# Altium PCB PCB.PcbDoc
Units mm, origin at the board's own origin, x right, y up, seen from the top; angles counter-clockwise.
Board outline 131.83 x 91.69 mm, 2 copper layers (Top Layer, Bottom Layer); 45 components, 60 nets, 198 pads, 15 vias.
Unrouted connection lines stored in the file: 1.
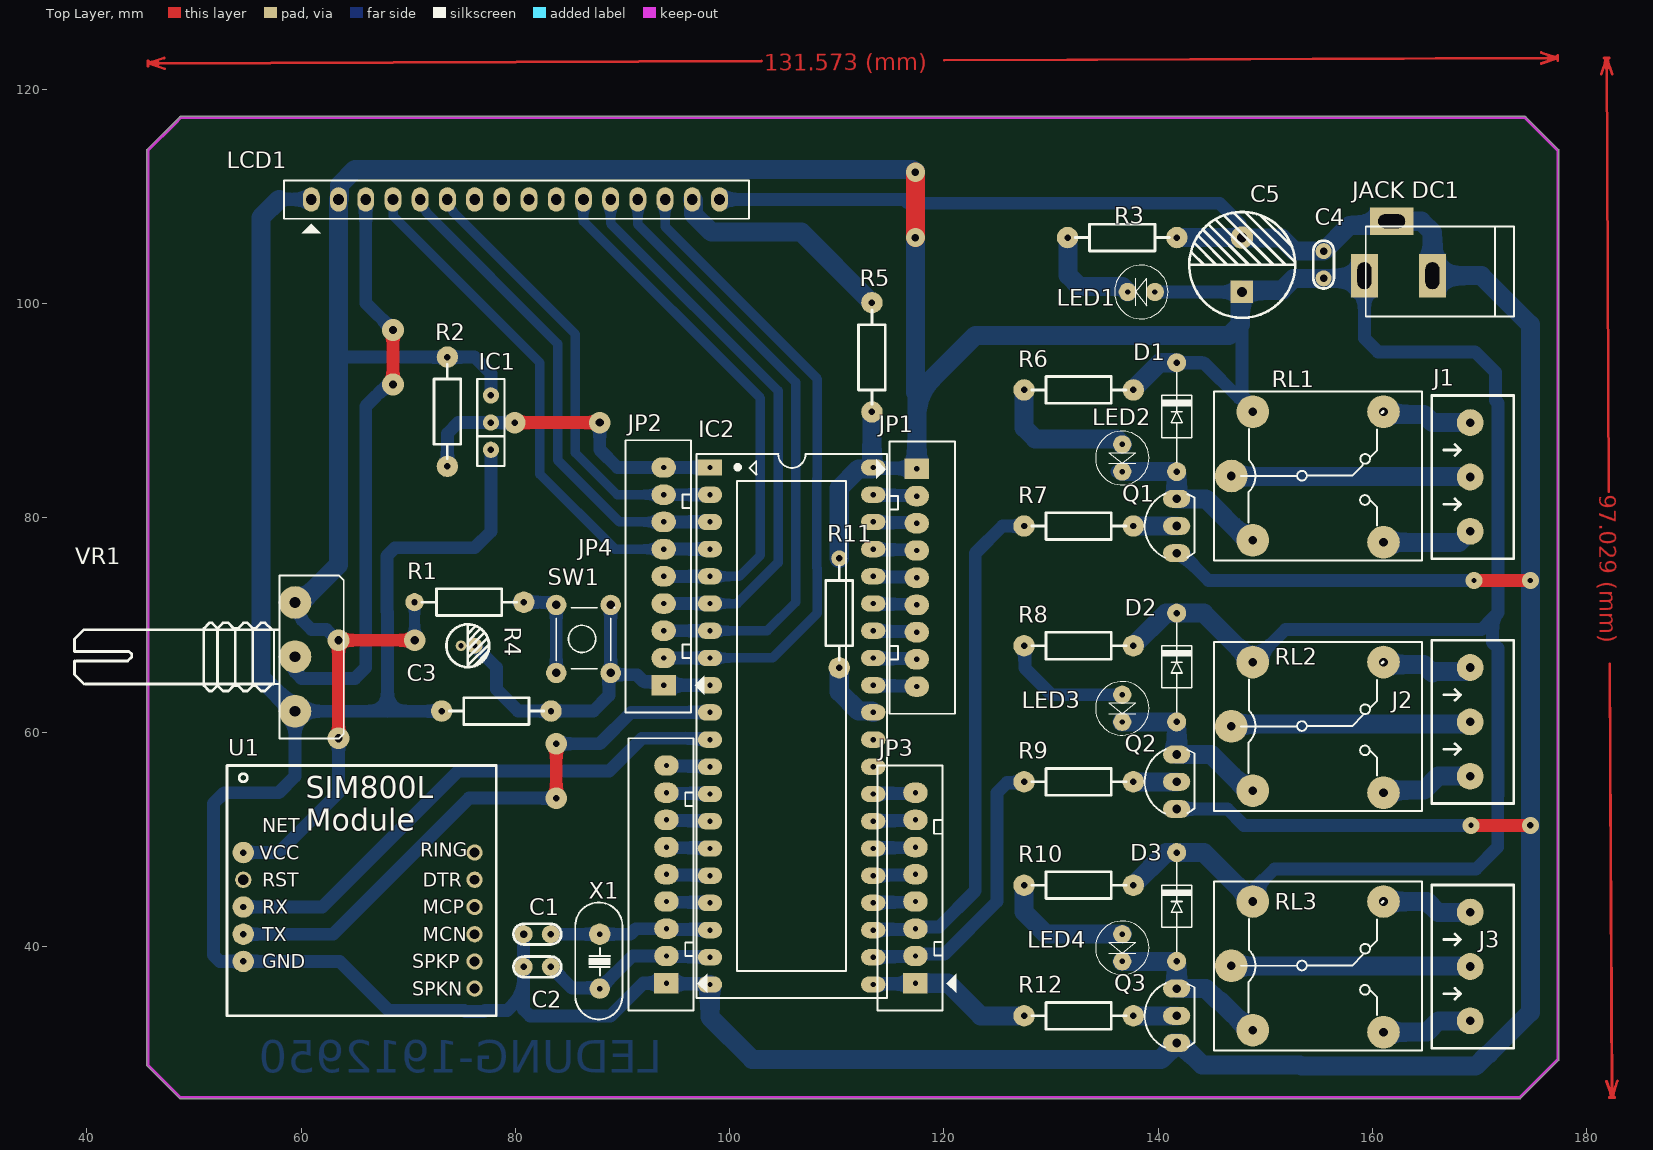
[diagram p0: Top Layer view]
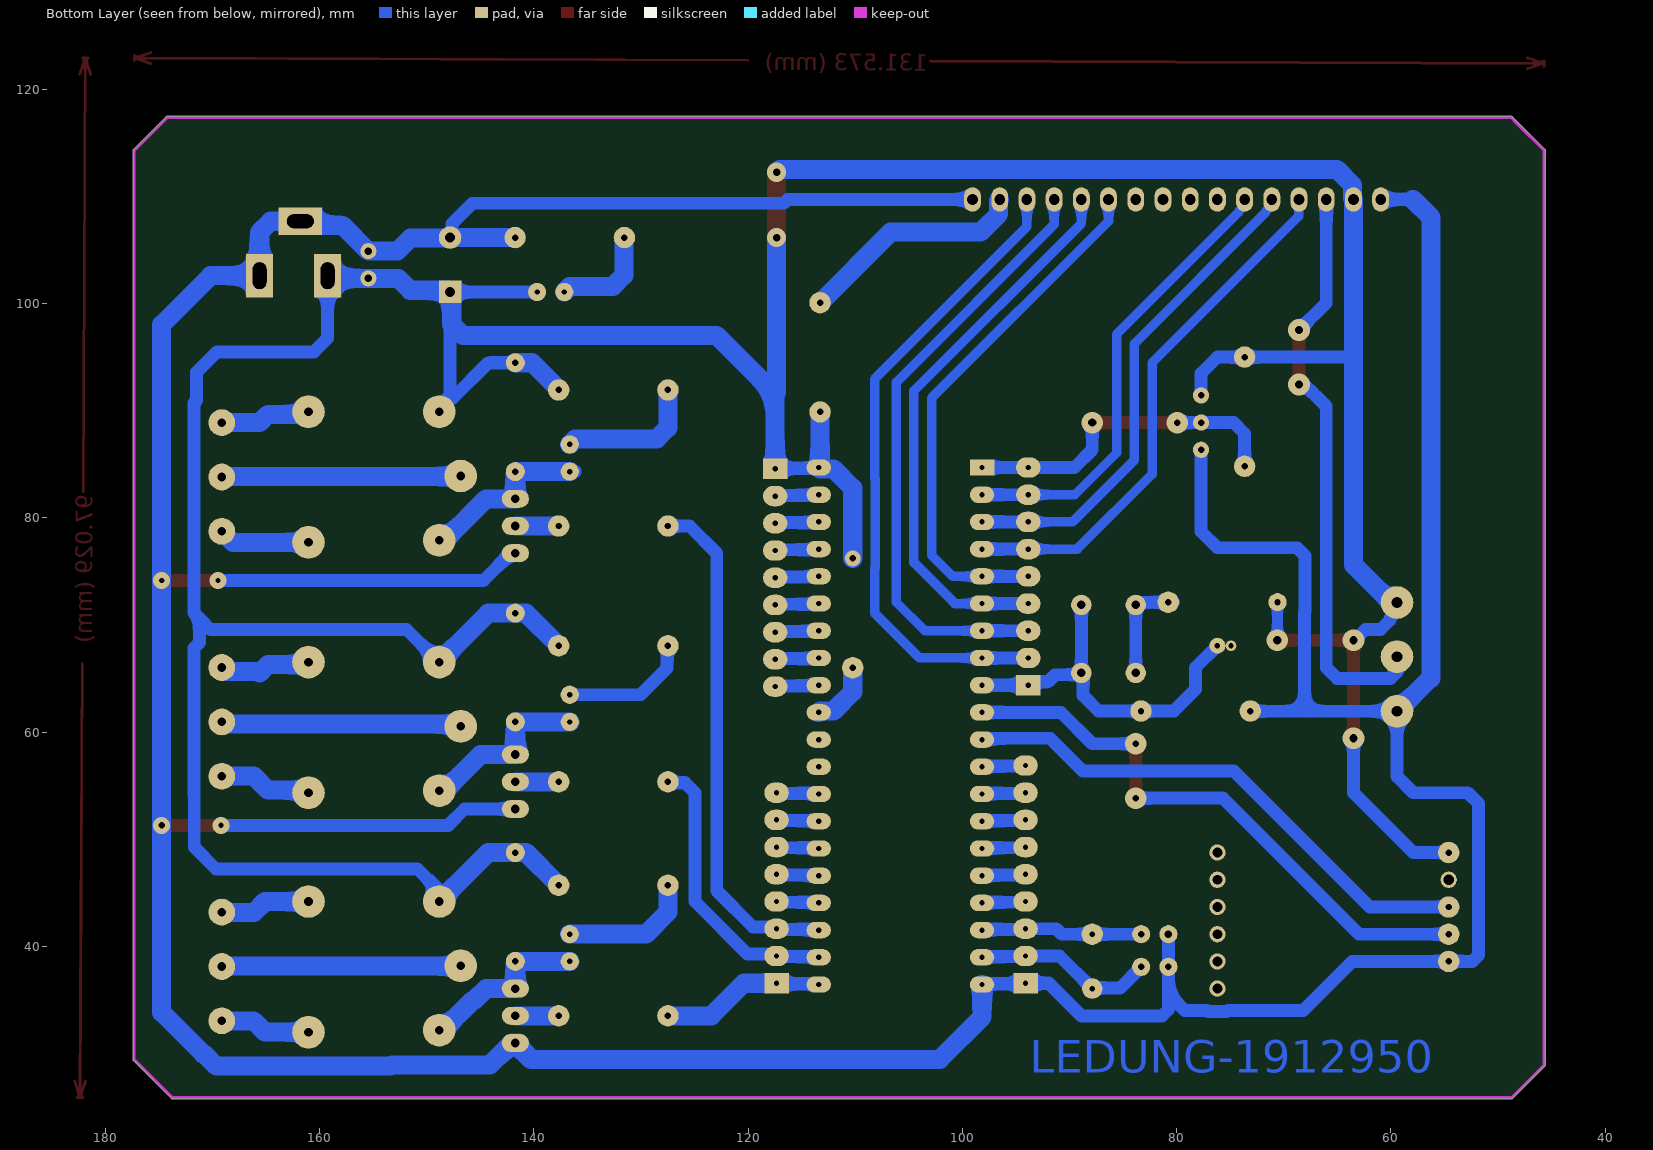
[diagram p1: Bottom Layer view, seen from below]
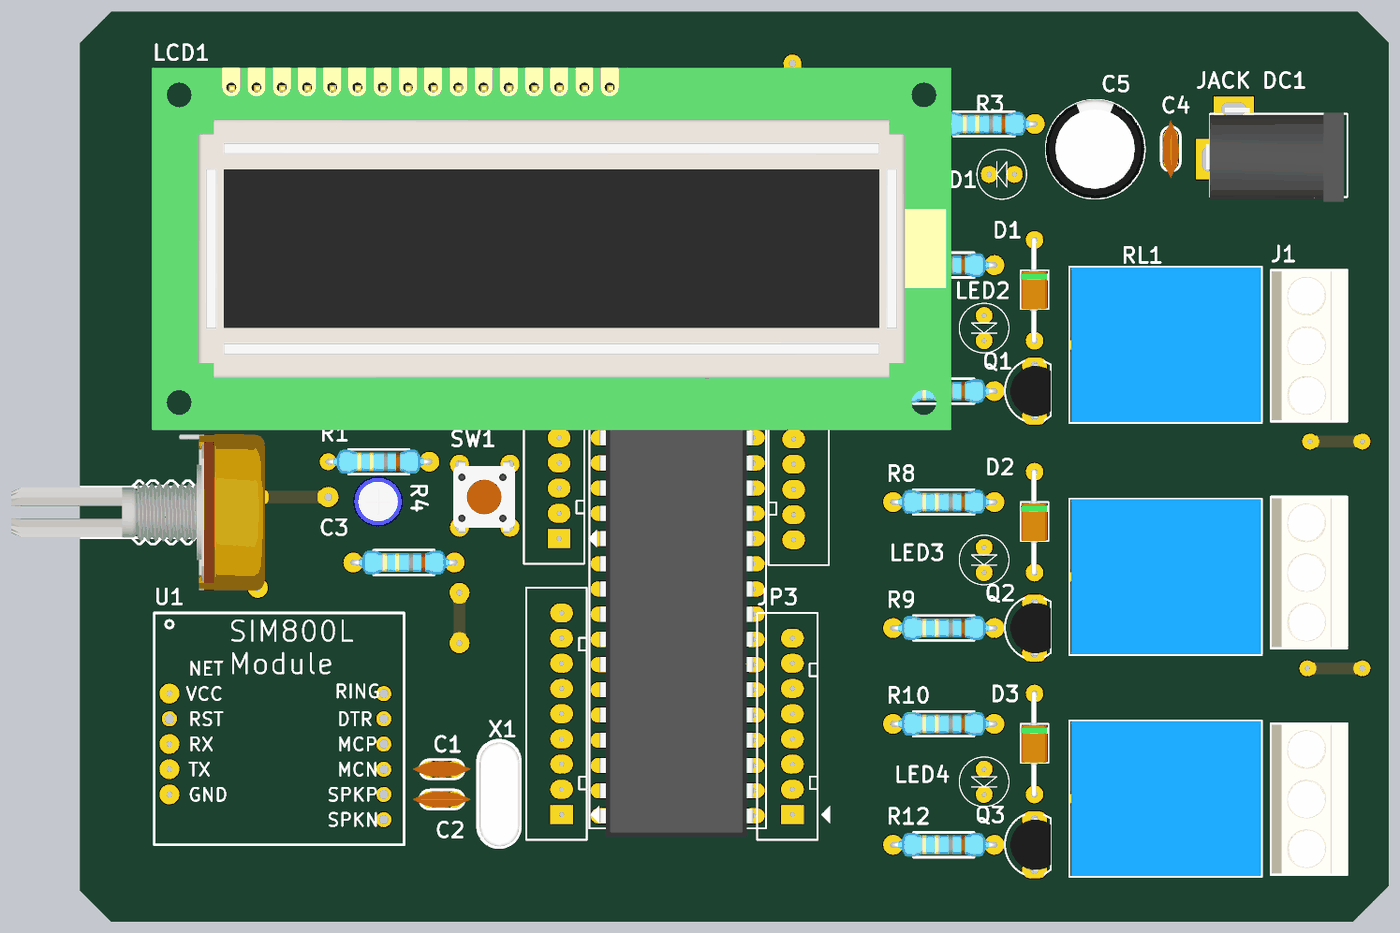
[diagram p2: 3D render of the assembled board from above, using the file's embedded part models]

## Layer stack, top to bottom
Top Solder: solder mask 0.0102, Solder Resist, Dk 3.5
Top Layer: signal copper 0.0356
Dielectric 1: dielectric 0.32, FR-4, Dk 4.8
Bottom Layer: signal copper 0.0356
Bottom Solder: solder mask 0.0102, Solder Resist, Dk 3.5

## Board outline
45.593,28.956 45.593,45.72 45.593,89.408 45.593,114.3 cw(c45.72,114.3) 45.63,114.39 48.678,117.438 cw(c48.768,117.349) 48.768,117.475 174.244,117.475 cw(c174.244,117.348) 174.335,117.438 177.382,114.39 cw(c177.293,114.3) 177.419,114.3 177.419,29.464 cw(c177.292,29.464) 177.382,29.373 173.826,25.818 cw(c173.736,25.907) 173.736,25.781 48.768,25.781 cw(c48.768,25.908) 48.677,25.818 45.63,28.866 cw(c45.719,28.956)

## Design rules (kind name [scope] priority, off if disabled: settings)
Clearance [All] p1: gap=0.762 ignorepadtopadclearanceinfootprint=FALSE
PolygonConnect [All] p1: connectstyle=Relief reliefconductorwidth=0.254 reliefentries=4 polygonreliefangle="90 Angle" airgapwidth=0.254
RoutingVias [All] p1: holewidth=0.762 width=2.032 viastyle="Through Hole" minholewidth=0.762 minwidth=2.032 maxholewidth=0.762 maxwidth=2.032
SolderMaskExpansion [All] p1: expansion=0.102 istentingtop=FALSE
Width [All] p1: maxlimit=1.778 minlimit=0.508 preferedwidth=1.016
30 further rules are at their usual default settings.

## Components (designator, comment, footprint, x,y, rotation, side; value= is the part's Value field where it differs from the comment)
C1 "30pF" "tu gom"#1 82.042,41.148 r180 top
C2 "33pF" "tu gom"#2 82.042,38.1 r180 top
C3 "10uF" "tu hoa 4mm" 75.565,68.072 r0 top
C4 "104" "tu gom"#3 155.448,103.632 r270 top
C5 "1000uF" "tu hoa 10mm" 147.828,103.632 r90 top
D1 "Diode" DIO-1A 141.732,84.328 r90 top value=1N5007
D2 "Diode" DIO-1A 141.732,60.96 r90 top value=1N5007
D3 "Diode" DIO-1A 141.732,38.608 r90 top value=1N5007
IC1 "DS18S20" JP3-C1T 77.724,86.36 r90 top
IC2 "AT89C52" DIP40/W0.6 98.171,84.709 r270 top
J1 "KF3" KF3-5.08 169.126,88.9 r270 top
J2 "KF3" KF3-5.08 169.126,66.04 r270 top
J3 "KF3" KF3-5.08 169.126,43.21 r270 top
"JACK DC1" "JACK DC 5.5" "JACK DC 5.5" 162.433,105.156 r180 top value="Jac DC"
JP1 "JP9" Header9 117.475,84.582 r270 top value="Connector 9"
JP2 "JP9" Header9 93.853,64.389 r90 top value="Connector 9"
JP3 "JP8" Header8 117.348,36.576 r90 top value="Connector 8"
JP4 "JP9" Header9 94.107,36.576 r90 top value="Connector 9"
LCD1 "LCD1602 XL" "LCD1602 with Jump" 60.96,109.728 r0 top
LED1 "LED" LED-5MM-RED 139.7,101.092 r180 top value="LED 3 ly Single Colour"
LED2 "LED" LED-5MM-RED 136.652,86.868 r270 top value="LED 3 ly Single Colour"
LED3 "LED" LED-5MM-RED 136.652,63.5 r270 top value="LED 3 ly Single Colour"
LED4 "LED" LED-5MM-RED 136.652,41.148 r270 top value="LED 3 ly Single Colour"
Q1 "2N3904" TO92-123 141.732,79.248 r90 top value=C1815
Q2 "2N3904" TO92-123 141.732,55.372 r90 top value=C1815
Q3 "2N3904" TO92-123 141.732,33.528 r90 top value=C1815
R1 "1k" "tro vach 1/4w"#1 75.692,72.136 r0 top
R2 "4.7K" "tro vach 1/4w"#2 73.66,89.916 r90 top
R3 "330" "tro vach 1/4w"#2 136.652,106.172 r0 top
R4 "10k" "tro vach 1/4w"#2 78.232,61.976 r0 top
R5 "470R" "tro vach 1/4w"#2 113.284,94.996 r90 top
R6 "330" "tro vach 1/4w"#2 132.588,91.948 r0 top
R7 "4.7K" "tro vach 1/4w"#2 132.588,79.248 r0 top
R8 "330" "tro vach 1/4w"#2 132.588,68.072 r0 top
R9 "4.7K" "tro vach 1/4w"#2 132.588,55.372 r0 top
R10 "330" "tro vach 1/4w"#2 132.588,45.72 r0 top
R11 "10k" "tro vach 1/4w"#3 110.236,71.12 r90 top
R12 "4.7K" "tro vach 1/4w"#2 132.588,33.528 r0 top
RL1 "Relay" "Relay 5 Chan SRD" 146.836,83.916 r0 top
RL2 "Relay" "Relay 5 Chan SRD" 146.836,60.548 r0 top
RL3 "Relay" "Relay 5 Chan SRD" 146.836,38.196 r0 top
SW1 "SW" SW2-DIP 83.82,65.532 r90 top value="Button chip 4 pin"
U1 "SIM800L" "SIM800L MODULE" 54.61,38.608 r0 top
VR1 "10K" "Bien Tro Volume Don" 59.436,72.111 r270 top
X1 "11.0592Mhz" XT2 87.884,38.608 r90 top value=4Mhz

## Footprints (in the part's own frame and the unit in brackets; to place one, negate y for a bottom-side part, rotate by r counter-clockwise, add the part's x,y. Pads: shape width x height; smd on the part's side, far side on the other; paste and mask are expansions set on the pad)
"Bien Tro Volume Don" [mil] "Volume control single"
  round 120 hole 39.37: 1(0,0) 2(199,0) 3(400,0)
  silkscreen extent -99,-810 500,179, body extent -110,-818 510,188, height 839
DIO-1A [mil]
  round 70 hole 23.62: 1(0,0) 2(400,0)
  silkscreen extent 35,-55 365,55, body extent -11,-50 411,54, height 102
DIP40/W0.6 [mil] "40 PIN, W 600mil, Pin to pin 100mil"
  rect 60x90 hole 19.68: 1(0,0)
  oval 60x90 hole 19.68: 2(100,0) 3(200,0) 4(300,0) 5(400,0) 6(500,0) 7(600,0) 8(700,0) 9(800,0) 10(900,0) 11(1000,0) 12(1100,0) 13(1200,0) 14(1300,0) 15(1400,0) 16(1500,0) 17(1600,0) 18(1700,0) 19(1800,0) 20(1900,0) 21(1900,600) 22(1800,600) 23(1700,600) 24(1600,600) 25(1500,600) 26(1400,600) 27(1300,600) 28(1200,600) 29(1100,600) 30(1000,600) 31(900,600) 32(800,600) 33(700,600) 34(600,600) 35(500,600) 36(400,600) 37(300,600) 38(200,600) 39(100,600) 40(0,600)
  silkscreen extent -50,-50 1950,650, body extent -82,-10 1982,600, height 224
Header8 [mm] "CON8"
  rect 1.905x2.286 hole 0.5: 1(0,0)
  oval 1.905x2.286 hole 0.5: 2(2.54,0) 3(5.08,0) 4(7.62,0) 5(10.16,0) 6(12.7,0) 7(15.24,0) 8(17.78,0)
  silkscreen extent -2.54,-3.8 20.32,3.56
Header9 [mm] "CON9"
  rect 1.905x2.286 hole 0.5: 1(0,0)
  oval 1.905x2.286 hole 0.5: 2(2.54,0) 3(5.08,0) 4(7.62,0) 5(10.16,0) 6(12.7,0) 7(15.24,0) 8(17.78,0) 9(20.32,0)
  silkscreen extent -2.54,-3.8 22.86,3.56
"JACK DC 5.5" [mm] "Jac DC input"
  rect 2.54x4.064 hole 1.3 slot 2.5 at 90 deg: 1(3.175,2.54) 2(-3.175,2.54)
  rect 4.064x2.54 hole 1.3 slot 2.5 at 0 deg: 3(0.635,-2.54)
  silkscreen extent -10.8,-2.03 3.05,6.35, body extent -10.42,-2.67 3.4,6.84, height 11.02
JP3-C1T [mm] "3 row, straight, gold plating"
  round 1.52 hole 0.6: 1(0,0) 2(2.54,0) 3(5.08,0)
  silkscreen extent -1.52,-1.27 6.6,1.27, body extent -1.52,-1.25 6.6,1.25, height 8.51
KF3-5.08 [mm]
  round 2.5 hole 0.8: 1(0,0) 2(5.08,0) 3(10.147,0)
  silkscreen extent -2.54,-3.58 12.7,4.06, body extent -2.42,-3.51 12.58,3.99, height 10
"LCD1602 with Jump" [mil] "LCD dipslay 16x2, 16 pin"
  oval 62x90 hole 39: 1(0,0) 2(100,0) 3(200,0) 4(300,0) 5(400,0) 6(500,0) 7(600,0) 8(700,0) 9(800,0) 10(900,0) 11(1000,0) 12(1100,0) 13(1200,0) 14(1300,0) 15(1400,0) 16(1500,0)
  silkscreen extent -100,-125 1608,70, body extent -320,-1353 2850,84, height 764
LED-5MM-RED [mm]
  round 1.7 hole 0.5: 1(0,0) 2(2.54,0)
  silkscreen extent -1.23,-2.5 3.77,2.5, body extent -1.38,-2.67 3.94,2.66, height 9.4
"Relay 5 Chan SRD" [mm] "Relay SPDT, 5 pin, 10A,W 650mil, L 800mil, H 800mil"
  round 3.048 hole 0.8: 1(0,0) 2(14.2,6) 3(14.2,-6.192) 4(2,-6) 5(2,6)
  silkscreen extent -1.61,-7.89 17.78,7.87, body extent -1.4,-7.77 17.7,7.73, height 15.3
"SIM800L MODULE" [mm]
  round 2 hole 0.6: 1(0,10.16) 3(0,5.08) 4(0,2.54) 5(0,0)
  round 1.52 hole 1: 2(0,7.62)
  round 1.52 hole 0.91: 6(21.59,10.16) 7(21.59,7.62) 8(21.59,5.08) 9(21.59,2.54) 10(21.59,0) 11(21.59,-2.54)
  silkscreen extent -1.52,-5.08 23.62,18.29
SW2-DIP [mil] "SW button 4pin, 250 x250 mil"
  round 75 hole 31: 1(0,0) 2(0,-200) 3(250,-200) 4(250,0)
  silkscreen extent 15,-215 240,0, body extent -36,-220 276,24, height 276
TO92-123 [mil] "TO-92"
  oval 66x100 hole 32: 1(-100,0) 2(0,0) 3(100,0)
  silkscreen extent -117,-65 120,118, body extent -109,-66 109,95, height 245
"tro vach 1/4w"#1 [mm]
  round 1.7 hole 0.6: 1(-5.1,0)
  round 2 hole 0.6: 2(5.1,0)
  silkscreen extent -4.39,-1.25 4.42,1.25, body extent -5.38,-1.2 5.38,1.2, height 2.41
"tro vach 1/4w"#2 [mm]
  round 2 hole 0.6: 1(-5.1,0) 2(5.1,0)
  silkscreen extent -4.39,-1.25 4.42,1.25, body extent -5.38,-1.2 5.38,1.2, height 2.41
"tro vach 1/4w"#3 [mm]
  round 2 hole 0.6: 1(-5.1,0)
  round 1.5 hole 0.6: 2(5.1,0)
  silkscreen extent -4.39,-1.25 4.42,1.25, body extent -5.38,-1.2 5.38,1.2, height 2.41
"tu gom"#1 [mm] "Tu gom mini"
  round 1.7 hole 0.6: 1(-1.27,0)
  round 1.7 hole 0.7: 2(1.27,0)
  silkscreen extent -2.25,-0.97 2.22,0.97, body extent -2.92,-0.85 2.92,0.85, height 6.12
"tu gom"#2 [mm] "Tu gom mini"
  round 1.7 hole 0.6: 1(-1.27,0) 2(1.27,0)
  silkscreen extent -2.25,-0.97 2.22,0.97, body extent -2.92,-0.85 2.92,0.85, height 6.12
"tu gom"#3 [mm] "Tu gom mini"
  round 1.5 hole 0.7: 1(-1.27,0) 2(1.27,0)
  silkscreen extent -2.25,-0.97 2.22,0.97, body extent -2.92,-0.85 2.92,0.85, height 6.12
"tu hoa 4mm" [mm]
  round 1 hole 0.5: 1(-0.635,0)
  round 1.5 hole 0.5: 2(0.635,0)
  silkscreen extent -2,-2 2.01,2.01, body extent -2.47,-2.47 2.58,2.58, height 14.81
"tu hoa 10mm" [mm]
  rect 2.1x2.1 hole 0.9: 1(-2.54,0)
  round 2.1 hole 0.9: 2(2.54,0)
  silkscreen extent -4.95,-4.96 4.93,4.92, body extent -5,-5 4.97,5, height 20.01
XT2 [mm] "Footpin for Crystal 2 pin"
  round 1.905 hole 0.5: 1(-2.54,0)
  round 2 hole 0.5: 2(2.54,0)
  silkscreen extent -5.41,-2.11 5.51,2.29, body extent -5.49,-2.2 5.49,2.29, height 3.65

## Part data
C1 C2: library part "Tu gom 30pF 50V", "Cắm", Chung_Loai=Cắm, Don_Vi=Con, Ma_Hang=MH004772, So_Chan=2, Ten_Linh_Kien="Tụ gốm 30P"
C3: library part "Tu Hoa 10uF 16V 4x7", "Cắm", Chung_Loai=Cắm, Don_Vi=Con, Ma_Hang=MH006855, So_Chan=2, Ten_Linh_Kien="Tụ Hóa 10uF 16V"
C4: library part "Tu gom 104 50V", "Cắm", Chung_Loai=Cắm, Don_Vi=Con, Ma_Hang=MH004761, So_Chan=2, Ten_Linh_Kien="Tụ gốm 104 100nF 50V"
C5: library part "Tu Hoa 1000uF 10V 10x12", "Cắm", Chung_Loai=Cắm, Don_Vi=Con, Ma_Hang=MH006614, So_Chan=2, Ten_Linh_Kien="Tụ Hóa 1000uF 10V 10x12MM"
D1 D2 D3: "Default Diode", Code - JEDEC=DO-214-AB, Published=8-Jun-2000, Publisher="Altium Limited", Revision="July-2002: Re-released for DXP Platform."
IC1: "High Precision  1-Wire® Digital Thermometer"
IC2: "Cắm", Chung_Loai=Cắm, Don_Vi=Con, Ma_Hang=MH002200, Ten_Linh_Kien="AT89C52-24PC DIP40"
J1 J2 J3: Manufacturer="Würth Elektronik eiSos GmbH", partNo=691103110003, ComponentLink1 Description=Manufacturer, ComponentLink1URL=http://www.we-online.com, ComponentLink2 Description=Datasheet, ComponentLink2URL=http://katalog.we-online.de/em/datasheet/6911031100xx.pdf, Created by="Karrer Zheng", Created Date="29 October 2013", NoPins=3
JP1 JP2 JP4: library part Header9, "Connector 9"
JP3: library part Header8, "Connector 8"
LCD1: "LCD 1602 Xanh Lá", CHIP=HD44780, Ma_Hang=67HZ, NCC=NSHOP, Ten="Màn hình LCD 1602 Xanh Lá"
LED1 LED2 LED3 LED4: "LED Single colour Green and Red"
Q1 Q2 Q3: library part 2N904, "NPN 600mW, ECB"
R1 R2 R3 R4 R5 R6 R7 R8 R9 R10 R11 R12: library part "Tro Vach 1/4W 1% 10k", "Cắm", Chung_Loai=Cắm, Don_Vi=Con, Ma_Hang=MH006349, So_Chan=2, Ten_Linh_Kien="Trở Vạch 1/4w 1% 10k"
RL1 RL2 RL3: library part "Relay 5 Chan SRD", "Relay 5 Chan", Ma_Hang=MH009374, Ten="Relay 5V10A SRD-05VDC-SL-C Chính Hãng"
SW1: library part SW4, "Switch button 4 pin"
VR1: library part "Triet Ap Don 10k", "Cắm", Chung_Loai=Cắm, Don_Vi=Con, Ma_Hang=MH001417, Ten_Linh_Kien="Triết Áp Đơn B10K"
X1: library part XT2, "Crystal, 32.768 KHz, -40 to 85 degC, 3.2 x 1.5 x 0.9 mm SMD"
U1: BOM_Supplier=Amazon, BOM_Supplier Part=B01DLIJM2E, Contributor=trigui, sourceId=ega4lDVPJ, spicePre=U, timeStamp=1475502242

## Via types
v1: diameter 2.032, hole 0.762, Top Layer to Bottom Layer, 5 vias
v2: diameter 2, hole 0.6, Top Layer to Bottom Layer, 3 vias
v3: diameter 1.6, hole 0.5, Top Layer to Bottom Layer, 3 vias
v4: diameter 1.8, hole 0.711, Top Layer to Bottom Layer, 2 vias
v5: diameter 1.6, hole 0.6, Top Layer to Bottom Layer, 1 vias
v6: diameter 2, hole 0.762, Top Layer to Bottom Layer, 1 vias

## Nets (pads, with @x,y where several pads share a name; then routed paths per layer and width w, separated by ;. In a path a pad name is that pad's centre, name@x,y a point inside that pad or via, vN(x,y) a via of type N, cw(c..) or ccw(c..) an arc to the next point about the centre after c; other vN are vias at no path point)
5V: "JACK DC1.1" C3.1 C4.2 C5.1 D1.2 D2.2 D3.2 IC1.3 IC2.40 JP1.1 LCD1.2 LED1.1 R1.1 R2.2 R5.1 R6.2 R8.2 R10.2 R11.2 RL1.5 RL2.5 RL3.5 U1.1 VR1.1 | length 427
  Top Layer w1.2: v1(63.5,59.436) v1(63.5,68.58) v1(70.612,68.58)
  Top Layer w1.778: v4(117.348,106.172) v4(117.348,112.268)
  Bottom Layer w0.889: R5.1 113.347,89.833 113.347,84.772 IC2.40
  Bottom Layer w1.016: R1.1 70.602,72.126 70.602,68.59 v1(70.612,68.58)
  Bottom Layer w1.2: U1.1 57.912,48.768 63.5,54.356 v1(63.5,59.436) ; VR1.1@59.986,72.111 VR1.1 59.436,71.288 60.1,70.624 60.1,70.474 60.977,69.596 62.381,69.596 63.397,68.58 v1(63.5,68.58) ; 63.5,94.996 63.52,95.016 R2.2 76.18,95.016 77.724,93.472 IC1.3 ; LCD1.2 LCD1.2@63.607,109.835 ; IC2.40 113.474,84.645 117.411,84.645 JP1.1 ; 117.411,91.63 117.475,91.567 ; LED1.1 C5.1 ; D1.2 144.264,94.488 147.553,91.199 ; 147.828,98.07 147.828,91.474 148.836,90.466 RL1.5 ; RL3.5 149.225,44.585 149.225,45.593 150.876,47.244 169.672,47.244 171.704,49.276 171.704,54.045 171.738,54.079 171.738,67.854 171.196,68.396 171.196,70.612 ; RL2.5 151.884,69.596 170.18,69.596 171.196,70.612 ; 159.258,102.616 159.258,96.774 160.528,95.504 169.585,95.504 171.485,93.604 171.485,90.967 171.738,90.714 171.738,71.154 171.196,70.612
  Bottom Layer w1.778: VR1.1@59.986,72.111 63.5,75.625 63.5,94.996 LCD1.2 ; LCD1.2@63.607,109.835 63.607,111.099 65.03,112.522 117.094,112.522 v4(117.348,112.268) ; R11.2 110.236,82.787 112.031,84.582 113.284,84.582 IC2.40 ; R5.1 113.284,84.836 IC2.40@113.347,84.772 ; v4(117.348,106.172) 117.348,91.694 117.475,91.567 ; JP1.1 117.475,91.567 ; R10.2 140.736,48.768 D3.2 144.264,48.768 RL3.5 ; R8.2 140.736,71.12 D2.2 144.264,71.12 RL2.5 ; R6.2 137.688,92.008 140.168,94.488 D1.2 ; 159.258,102.616 159.004,102.362 C4.2 152.654,102.362 151.545,101.253 147.989,101.253 C5.1 147.667,100.931 147.667,98.07 146.625,97.028 122.936,97.028 117.475,91.567
D4: IC2.5 JP2.5 LCD1.11 | length 49.9
  Bottom Layer w0.889: LCD1.11 86.36,107.696 102.87,91.186 102.87,76.516 100.903,74.549 IC2.5
  Bottom Layer w1.2: JP2.5 IC2.5
D5: IC2.6 JP2.4 LCD1.12 | length 52.6
  Bottom Layer w0.889: LCD1.12 88.9,107.491 104.521,91.87 104.521,75.832 100.698,72.009 IC2.6
  Bottom Layer w1.2: JP2.4 IC2.6
D6: IC2.7 JP2.3 LCD1.13 | length 57.1
  Bottom Layer w0.889: LCD1.13 91.44,107.393 106.172,92.661 106.172,72.136 103.505,69.469 IC2.7
  Bottom Layer w1.2: JP2.3 IC2.7
D7: IC2.8 JP2.2 LCD1.14 | length 60.6
  Bottom Layer w0.889: LCD1.14 93.98,107.188 108.204,92.964 108.204,83.719 108.14,83.655 108.14,75.352 108.204,75.289 108.204,71.12 104.013,66.929 IC2.8
  Bottom Layer w1.2: JP2.2 IC2.8
EN: IC2.2 JP2.8 LCD1.6 | length 42.8
  Bottom Layer w0.889: LCD1.6 73.66,109.187 74.206,108.641 74.206,108.547 85.598,97.155 85.598,86.091 89.52,82.169 JP2.8
  Bottom Layer w1.2: JP2.8 IC2.2
fan: IC2.23 JP3.3 R7.1 | length 48.2
  Bottom Layer w1.2: IC2.23 113.474,41.593 117.284,41.593 JP3.3 117.518,41.826 119.55,41.826 122.936,45.212 122.936,76.708 125.476,79.248 R7.1
GND: "JACK DC1.2" "JACK DC1.3" C1.2 C2.2 C4.1 C5.2 IC1.1 IC2.20 JP4.1 LCD1.1 LCD1.16 Q1.1 Q2.1 Q3.1 R3.2 R4.1 U1.5 VR1.3 | length 540.2
  Top Layer w1.2: v3(169.199,51.308) v5(174.752,51.308) ; v3(169.484,74.168) v3(174.752,74.168)
  Bottom Layer w1.2: 56.388,65.024 56.388,108.117 57.999,109.728 LCD1.1 ; R4.1 73.119,61.963 68.072,61.963 ; IC1.1 77.724,78.74 76.2,77.216 68.775,77.216 68.022,76.463 68.022,71.282 68.072,71.232 68.072,61.963 ; C1.2 C2.2 80.772,35.56 ; IC2.20 98.108,36.512 94.17,36.512 JP4.1 91.948,36.576 88.9,33.528 81.367,33.528 80.772,34.123 80.772,35.56 ; LCD1.16 116.327,109.728 116.679,109.376 145.739,109.376 147.656,107.458 147.656,106.344 C5.2 ; Q2.1 146.471,52.832 147.995,51.308 v3(169.199,51.308) ; Q1.1 141.888,76.552 142.319,76.552 144.704,74.168 v3(169.484,74.168) ; 68.072,61.963 59.449,61.963 VR1.3 59.436,55.88 57.912,54.356 52.832,54.356 51.816,53.34 51.816,39.203 52.411,38.608 U1.5 63.609,38.608 68.181,34.036 75.231,34.036 75.321,33.946 77.079,33.946 77.169,34.036 79.248,34.036 80.772,35.56
  Bottom Layer w1.778: 56.261,65.024 56.261,108.051 57.938,109.728 57.999,109.728 ; 56.388,65.024 56.388,64.999 VR1.3 ; IC2.20 98.171,33.401 102.108,29.464 140.259,29.464 141.351,30.556 141.351,30.937 141.402,30.988 Q3.1 142.062,30.988 144.094,28.956 153.248,28.956 153.375,28.829 169.646,28.829 170.796,29.979 170.877,29.979 174.752,33.853 174.752,98.044 170.18,102.616 165.608,102.616 165.608,106.654 164.566,107.696 161.798,107.696 161.417,107.315 157.861,107.315 C4.1 152.741,104.902 151.533,106.11 147.89,106.11 C5.2 R3.2
NetD1_1: D1.1 LED2.2 Q1.3 RL1.4 | length 16.8
  Bottom Layer w1.2: LED2.2@136.144,84.328 LED2.2
  Bottom Layer w1.778: LED2.2 D1.1 Q1.3 144.474,81.788 148.103,78.159 148.593,78.159 RL1.4
NetD2_1: D2.1 LED3.2 Q2.3 RL2.4 | length 16.6
  Bottom Layer w1.778: LED3.2 D2.1 Q2.3 144.982,57.912 148.103,54.791 148.593,54.791 RL2.4
NetD3_1: D3.1 LED4.2 Q3.3 RL3.4 | length 16.3
  Bottom Layer w1.778: LED4.2 D3.1 Q3.3 144.474,36.068 145.588,34.953 145.735,34.953 148.492,32.196 RL3.4
NetIC2_12: IC2.12 JP4.9 | length 4.1
  Bottom Layer w1.2: JP4.9 94.17,56.832 98.108,56.832 IC2.12
NetIC2_13: IC2.13 JP4.8 | length 4.1
  Bottom Layer w1.2: JP4.8 94.17,54.292 98.108,54.292 IC2.13
NetIC2_14: IC2.14 JP4.7 | length 4.1
  Bottom Layer w1.2: JP4.7 94.17,51.752 98.108,51.752 IC2.14
NetIC2_15: IC2.15 JP4.6 | length 4.1
  Bottom Layer w1.2: JP4.6 94.17,49.212 98.108,49.212 IC2.15
NetIC2_16: IC2.16 JP4.5 | length 4.1
  Bottom Layer w1.2: JP4.5 94.17,46.672 98.108,46.672 IC2.16
NetIC2_17: IC2.17 JP4.4 | length 4.1
  Bottom Layer w1.2: JP4.4 94.17,44.133 98.108,44.133 IC2.17
NetIC2_24: IC2.24 JP3.4 | length 4
  Bottom Layer w1.2: IC2.24 113.474,44.133 117.284,44.133 JP3.4
NetIC2_25: IC2.25 JP3.5 | length 4
  Bottom Layer w1.2: IC2.25 113.474,46.672 117.284,46.672 JP3.5
NetIC2_26: IC2.26 JP3.6 | length 4
  Bottom Layer w1.2: IC2.26 113.474,49.212 117.284,49.212 JP3.6
NetIC2_27: IC2.27 JP3.7 | length 4
  Bottom Layer w1.2: IC2.27 113.474,51.752 117.284,51.752 JP3.7
NetIC2_28: IC2.28 JP3.8 | length 4
  Bottom Layer w1.2: IC2.28 113.474,54.292 117.284,54.292 JP3.8
NetIC2_31: IC2.31 R11.1 | length 6.2
  Bottom Layer w1.778: R11.1 110.236,63.771 112.031,61.976 113.284,61.976 IC2.31
NetIC2_32: IC2.32 JP1.9 | length 4.1
  Bottom Layer w1.2: IC2.32 113.474,64.325 117.411,64.325 JP1.9
NetIC2_33: IC2.33 JP1.8 | length 4.1
  Bottom Layer w1.2: IC2.33 113.474,66.865 117.411,66.865 JP1.8
NetIC2_34: IC2.34 JP1.7 | length 4.1
  Bottom Layer w1.2: IC2.34 113.474,69.406 117.411,69.406 JP1.7
NetIC2_35: IC2.35 JP1.6 | length 4.1
  Bottom Layer w1.2: IC2.35 113.474,71.945 117.411,71.945 JP1.6
NetIC2_36: IC2.36 JP1.5 | length 4.1
  Bottom Layer w1.2: IC2.36 113.474,74.486 117.411,74.486 JP1.5
NetIC2_37: IC2.37 JP1.4 | length 4.1
  Bottom Layer w1.2: IC2.37 113.474,77.025 117.411,77.025 JP1.4
NetIC2_38: IC2.38 JP1.3 | length 4.1
  Bottom Layer w1.2: IC2.38 113.474,79.566 117.411,79.566 JP1.3
NetIC2_39: IC2.39 JP1.2 | length 4.1
  Bottom Layer w1.2: IC2.39 113.474,82.105 117.411,82.105 JP1.2
NetJ1_1: J1.1 RL1.2 | length 8.5
  Bottom Layer w1.778: RL1.2 161.279,89.673 164.835,89.673 165.608,88.9 J1.1
NetJ1_2: J1.2 RL1.1 | length 22.3
  Bottom Layer w1.778: RL1.1 146.884,83.868 169.078,83.868 J1.2
NetJ1_3: J1.3 RL1.3 | length 8.5
  Bottom Layer w1.778: RL1.3 168.097,77.724 J1.3
NetJ2_1: J2.1 RL2.2 | length 8.7
  Bottom Layer w1.778: RL2.2 161.279,66.305 164.835,66.305 165.608,65.532 165.755,65.679 168.765,65.679 J2.1
NetJ2_2: J2.2 RL2.1 | length 22.5
  Bottom Layer w1.778: RL2.1 147.042,60.754 168.92,60.754 J2.2
NetJ2_3: J2.3 RL2.3 | length 8.7
  Bottom Layer w1.778: RL2.3 161.279,54.599 164.835,54.599 166.129,55.893 J2.3
NetJ3_1: J3.1 RL3.2 | length 8.5
  Bottom Layer w1.778: RL3.2 165.1,44.196 166.116,43.18 169.096,43.18 J3.1
NetJ3_2: J3.2 RL3.1 | length 22.3
  Bottom Layer w1.778: RL3.1 146.869,38.163 169.093,38.163 J3.2
NetJ3_3: J3.3 RL3.3 | length 8.5
  Bottom Layer w1.778: RL3.3 165.1,32.004 166.158,33.062 J3.3
NetLCD1_3: LCD1.3 VR1.2 | length 54.8
  Top Layer w1.2: v1(68.58,92.456) v1(68.58,97.536)
  Bottom Layer w1.2: VR1.2 59.436,65.619 60.031,65.024 65.024,65.024 66.04,66.04 66.04,90.424 68.072,92.456 v1(68.58,92.456) ; LCD1.3 66.04,100.076 v1(68.58,97.536)
NetLCD1_15: LCD1.15 R5.2 | length 21.5
  Bottom Layer w1.778: LCD1.15 96.622,109.626 96.622,108.362 98.294,106.69 106.69,106.69 R5.2
NetLED1_2: LED1.2 R3.1 | length 9.8
  Bottom Layer w1.778: R3.1 131.594,106.13 131.594,102.642 132.636,101.6 136.652,101.6 LED1.2
NetLED2_1: LED2.1 R6.1 | length 13.3
  Bottom Layer w1.778: R6.1 127.488,88.418 128.53,87.376 136.144,87.376 LED2.1
NetLED3_1: LED3.1 R8.1 | length 12.2
  Bottom Layer w1.2: R8.1 127.561,67.999 127.561,65.987 130.048,63.5 LED3.1
NetLED4_1: LED4.1 R10.1 | length 12.5
  Bottom Layer w1.778: R10.1 127.488,43.2 129.54,41.148 LED4.1
NetQ1_2: Q1.2 R7.2 | length 4
  Bottom Layer w1.778: R7.2 Q1.2
NetQ2_2: Q2.2 R9.2 | length 4
  Bottom Layer w1.778: R9.2 Q2.2
NetQ3_2: Q3.2 R12.2 | length 4
  Bottom Layer w1.778: R12.2 Q3.2
NetR1_2: R1.2 SW1.1 SW1.4 | length 10
  Bottom Layer w1.2: R1.2@80.284,72.136 83.325,72.136 83.579,71.882 SW1.4 SW1.1
P1.0: IC1.2 IC2.1 JP2.9 R2.1 | length 31.2
  Top Layer w1.2: v2(79.931,88.9) v6(87.884,88.9)
  Bottom Layer w1.2: R2.1 73.66,87.884 74.676,88.9 v2(79.931,88.9) ; v6(87.884,88.9) 87.884,86.36 89.535,84.709 JP2.9 IC2.1
rl1: IC2.21 JP3.1 R12.1 | length 15.4
  Bottom Layer w1.2: IC2.21 113.474,36.512 117.284,36.512 JP3.1
  Bottom Layer w1.778: JP3.1 120.396,36.576 123.444,33.528 R12.1
rl2: IC2.22 JP3.2 R9.1 | length 26.8
  Bottom Layer w1.2: IC2.22 113.474,39.052 117.284,39.052 117.483,39.251 118.172,39.251 118.207,39.286 120.058,39.286 124.968,44.196 124.968,54.356 125.911,55.299 127.415,55.299 R9.1
RS: IC2.4 JP2.6 LCD1.4 | length 50.1
  Bottom Layer w0.889: LCD1.4 68.607,109.701 68.607,108.177 82.296,94.488 82.296,84.081 89.288,77.089 JP2.6
  Bottom Layer w1.2: JP2.6 IC2.4
RST: C3.2 IC2.9 JP2.1 R4.2 SW1.2 SW1.3 | length 35.1
  Bottom Layer w1.2: C3.2 78.232,66.04 78.232,64.008 80.264,61.976 R4.2 87.289,61.976 88.73,63.417 88.73,65.362 SW1.2 ; SW1.3 SW1.2 ; IC2.9 JP2.1 93.535,64.706 91.998,64.706 91.343,65.362 89.07,65.362 SW1.2
RW: IC2.3 JP2.7 LCD1.5 | length 46.3
  Bottom Layer w0.889: LCD1.5 71.12,109.187 71.666,108.641 71.666,108.547 83.947,96.266 83.947,85.407 89.725,79.629 JP2.7
  Bottom Layer w1.2: JP2.7 IC2.3
RX: IC2.10 U1.4 | length 55.1
  Top Layer w1.2: v2(83.82,53.848) v2(83.82,58.928)
  Bottom Layer w1.2: U1.4 62.992,41.148 75.692,53.848 v2(83.82,53.848) ; v2(83.82,58.928) 87.884,58.928 90.805,61.849 IC2.10
TX: IC2.11 U1.3 | length 50.1
  Bottom Layer w1.2: U1.3 61.976,43.688 74.676,56.388 88.768,56.388 91.816,59.436 97.304,59.436 97.334,59.406 98.074,59.406 IC2.11
X1: C1.1 IC2.18 JP4.3 X1.2 | length 15.1
  Bottom Layer w1.2: C1.1 X1.2 90.731,41.148 91.239,41.656 JP4.3 94.17,41.593 98.108,41.593 IC2.18
X2: C2.1 IC2.19 JP4.2 X1.1 | length 17
  Bottom Layer w1.2: C2.1 85.277,36.135 87.817,36.135 X1.1 90.932,39.116 JP4.2 94.17,39.052 98.108,39.052 IC2.19
pads on no net: IC2.29 IC2.30 LCD1.7 LCD1.8 LCD1.9 LCD1.10 U1.2 U1.6 U1.7 U1.8 U1.9 U1.10 U1.11
copper on no net: | length 210.4
  Top Layer w0.254: 45.719,122.682 45.721,122.174 ; 47.242,122.942 45.72,122.428 ; 47.246,121.926 45.72,122.428 ; 102.974,122.649 45.72,122.428 ; 120.038,122.715 177.292,122.936 ; 175.766,123.438 177.292,122.936 ; 175.77,122.422 177.292,122.936 ; 177.291,123.19 177.293,122.682 ; 181.364,121.409 181.864,122.936 ; 181.61,122.935 182.118,122.937 ; 181.856,27.429 182.372,25.908 ; 182.076,82.446 181.864,122.936 ; 182.118,25.907 182.626,25.909 ; 182.16,66.398 182.372,25.908 ; 182.38,121.415 181.864,122.936 ; 182.872,27.435 182.372,25.908

## Keep-outs
Keep-Out Layer:
  lines w0.254: 50.8,117.348 174.244,117.348 177.292,114.3 177.292,29.464 173.736,25.908 48.768,25.908 45.72,28.956 45.72,45.72 45.72,89.408 45.72,112.268 45.72,114.3 48.26,116.84 48.768,117.348 53.34,117.348

## Other copper
Top Layer:
  text "131.573 (mm)" at 103.232,121.736 h1.52 r0.22
  text "97.029 (mm)" at 181.163,82.187 h1.52 r270.3
Bottom Layer:
  text "LEDUNG-1912950" at 93.726,28.194 h3.05

## Text inside footprints (layer, text, board x,y; h text height)
U1: Top Overlay "SIM800L / Module" at 60.452,50.8 h2.03; Top Overlay "GND" at 56.388,37.958 h1.3; Top Overlay "TX" at 56.388,40.498 h1.3; Top Overlay "RX" at 56.388,43.038 h1.3; Top Overlay "RST" at 56.388,45.578 h1.3; Top Overlay "DTR" at 71.374,45.578 h1.3; Top Overlay "MCP" at 71.374,43.038 h1.3; Top Overlay "MCN" at 71.374,40.498 h1.3; Top Overlay "SPKP" at 70.358,37.958 h1.3; Top Overlay "SPKN" at 70.358,35.418 h1.3; Top Overlay "VCC" at 56.134,48.118 h1.3; Top Overlay "NET" at 56.388,50.658 h1.3; Top Overlay "RING" at 71.12,48.372 h1.3